# EAGLE board logic board R0.1 (EAGLE 5.10)
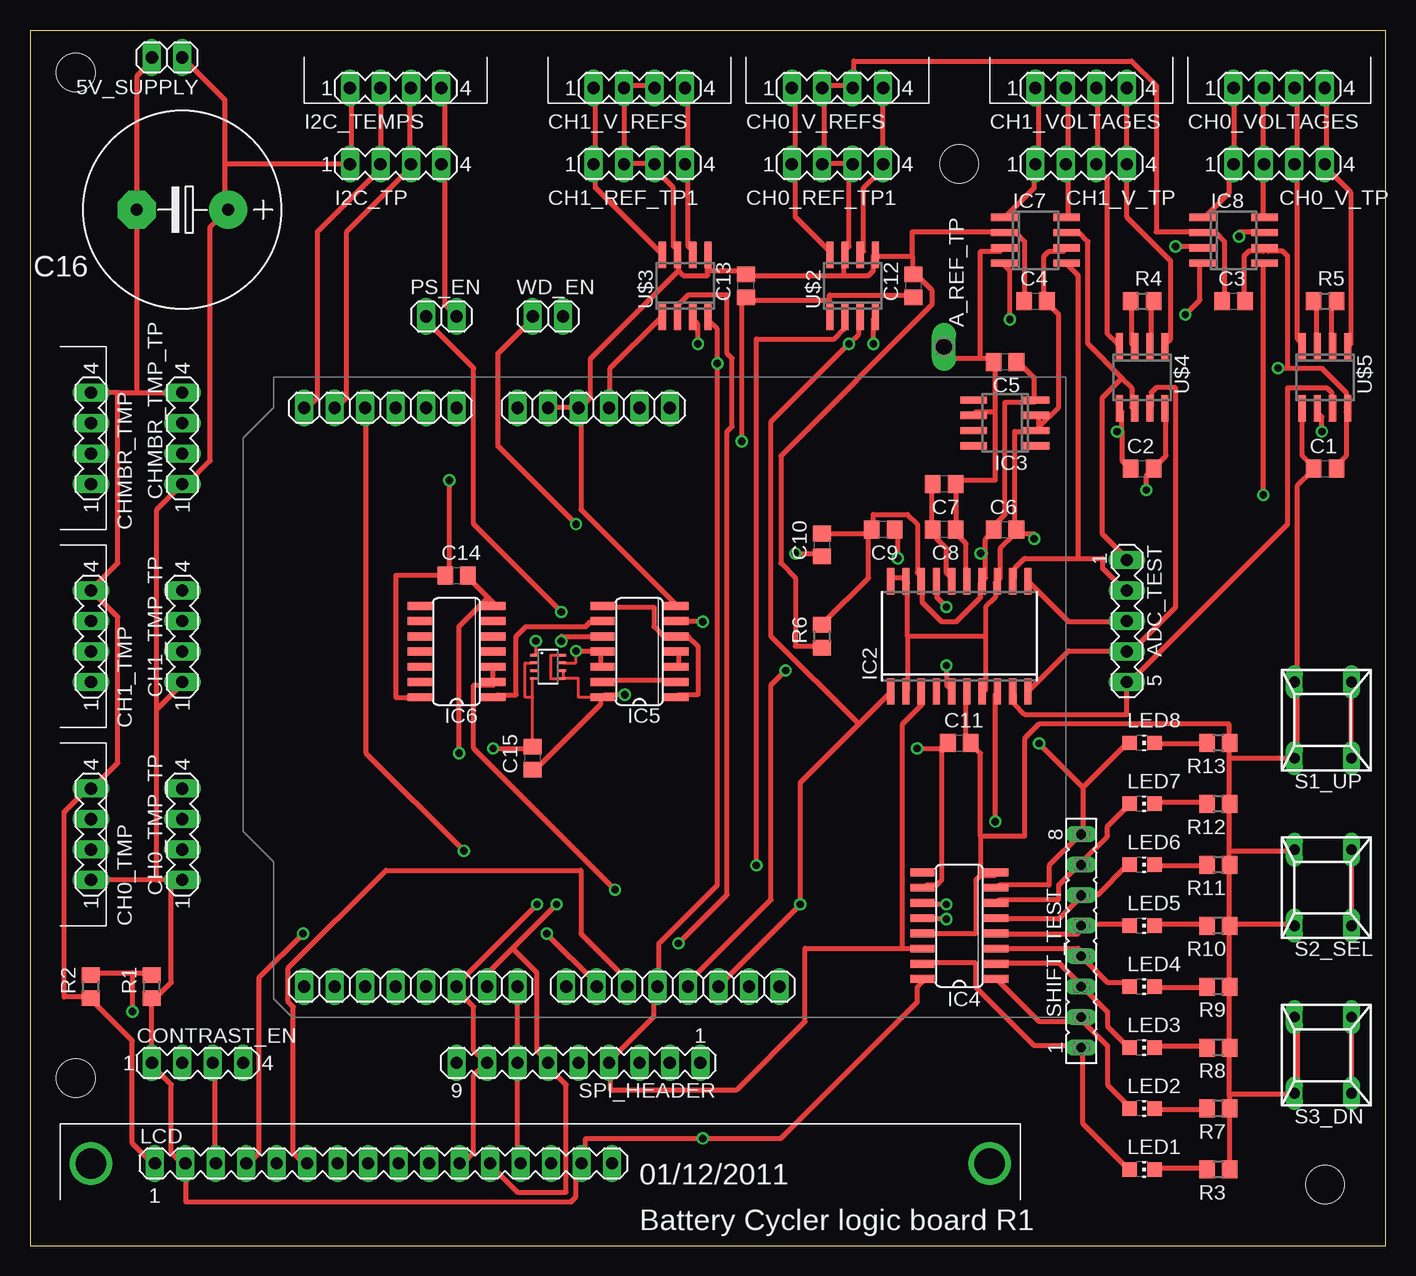
[diagram p0: board, top side]
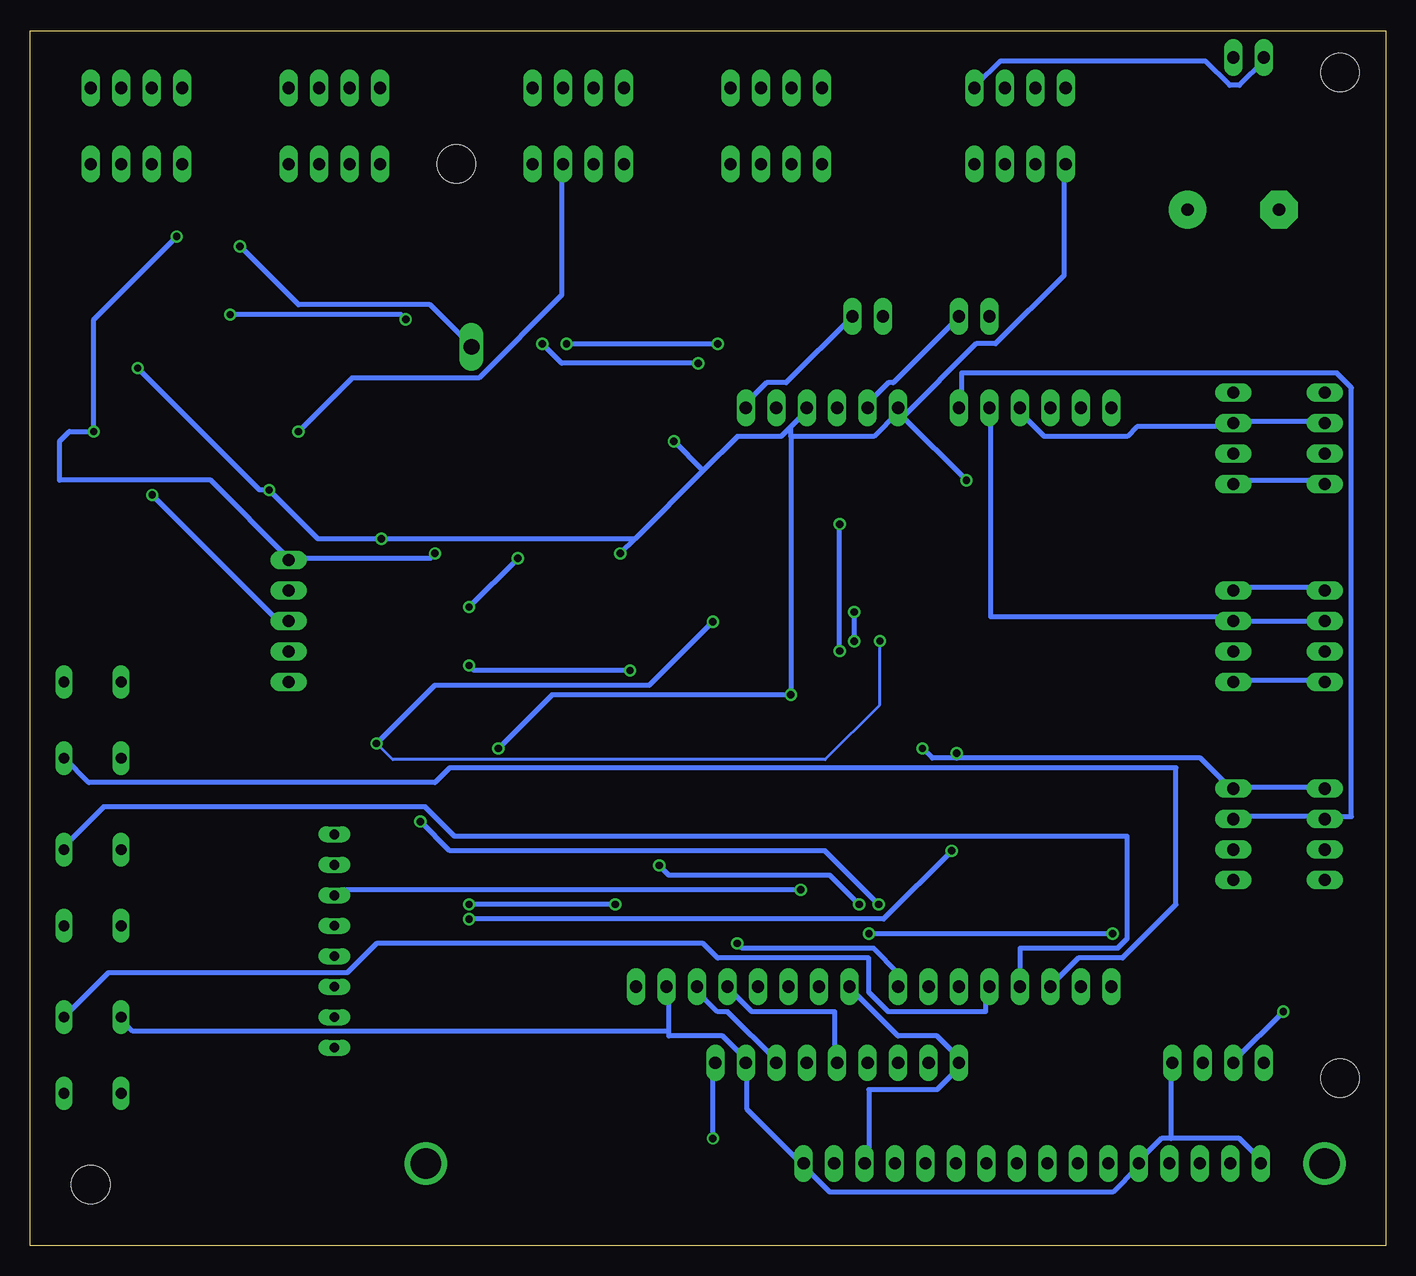
[diagram p1: board, bottom side, seen from below]

Size 113.01 x 101.27 mm. Coordinates in mm from the lower left corner, seen from the top.
Outline: 0,0 113.01,0 113.01,101.27 0,101.27 0,0
Copper layers (1*16): Top 0.035mm / dielectric 1.5mm / Bottom 0.035mm
Design rules "default *": minimum track width 16mil, minimum drill 24mil, track to track 8mil, track to pad 12mil, pad to pad 8mil, via to via 8mil, smd to smd 8mil, copper to edge 40mil, drill to drill 8mil, minimum pad ring 10mil, minimum via ring 8mil, stop-mask expansion 4mil, vias tented up to drill 0mil, thermal gap 10mil
Holes 3.2 mm at 3.81,97.79 3.81,13.97 107.95,5.08 77.47,90.17

## Footprints (pad centres in the part's own frame; a part is rotated, then mirrored left to right if it is on the bottom)
1X02 = drill 1.016 long: 1 -1.27,0; 2 1.27,0
P1-13Y = drill 1.321 pad 1.905 long: TP 0,0
MA05-1 = drill 1.016 long: 1 -5.08,0; 2 -2.54,0; 3 0,0; 4 2.54,0; 5 5.08,0
C0805 = smd 1.3 x 1.5: 1 -0.95,0; 2 0.95,0
E7,5-16 = drill 1.016 pad 3.15 round: + -3.81,0 | drill 1.016 pad 3.15 octagon: - 3.81,0
MA04-1 = drill 1.016 long: 1 -3.81,0; 2 -1.27,0; 3 1.27,0; 4 3.81,0
4PIN_HORIZONTAL_MOFIFIED = drill 1.016 long: 1 -3.81,0; 2 -1.27,0; 3 1.27,0; 4 3.81,0
ARDUINO2009_HOLELESS = drill 1.016 long: 1 33.02,2.54; 2 35.56,2.54; 3 38.1,2.54; 4 40.64,2.54; 5 43.18,2.54; 6 45.72,2.54; 7 50.8,2.54; 8 53.34,2.54; 9 55.88,2.54; 10 58.42,2.54; 11 60.96,2.54; 12 63.5,2.54; 13 63.5,50.8; 14 60.96,50.8; 15 58.42,50.8; 16 55.88,50.8; 17 53.34,50.8; 18 50.8,50.8; 19 48.26,50.8; 20 45.72,50.8; 21 41.656,50.8; 22 39.116,50.8; 23 36.576,50.8; 24 34.036,50.8; 25 31.496,50.8; 26 28.956,50.8; 27 26.416,50.8; 28 23.876,50.8
SO20W = smd 0.6 x 2.2: 1 -5.715,-4.6; 2 -4.445,-4.6; 3 -3.175,-4.6; 4 -1.905,-4.6; 5 -0.635,-4.6; 6 0.635,-4.6; 7 1.905,-4.6; 8 3.175,-4.6; 9 4.445,-4.6; 10 5.715,-4.6; 11 5.715,4.6; 12 4.445,4.6; 13 3.175,4.6; 14 1.905,4.6; 15 0.635,4.6; 16 -0.635,4.6; 17 -1.905,4.6; 18 -3.175,4.6; 19 -4.445,4.6; 20 -5.715,4.6
SO08 = smd 0.6 x 2.2: 1 -1.905,-2.6; 2 -0.635,-2.6; 3 0.635,-2.6; 4 1.905,-2.6; 5 1.905,2.6; 6 0.635,2.6; 7 -0.635,2.6; 8 -1.905,2.6
SO16 = smd 0.66 x 2.032: 1 -4.445,-3.073; 2 -3.175,-3.073; 3 -1.905,-3.073; 4 -0.635,-3.073; 5 0.635,-3.073; 6 1.905,-3.073; 7 3.175,-3.073; 8 4.445,-3.073; 9 4.445,3.073; 10 3.175,3.073; 11 1.905,3.073; 12 0.635,3.073; 13 -0.635,3.073; 14 -1.905,3.073; 15 -3.175,3.073; 16 -4.445,3.073
SO14 = smd 0.66 x 2.032: 1 -3.81,-3.073; 2 -2.54,-3.073; 3 -1.27,-3.073; 4 0,-3.073; 5 1.27,-3.073; 6 2.54,-3.073; 7 3.81,-3.073; 8 3.81,3.073; 9 2.54,3.073; 10 1.27,3.073; 11 0,3.073; 12 -1.27,3.073; 13 -2.54,3.073; 14 -3.81,3.073
HDM16216L-5_MODIFIED = drill 1.016 long: 1 -31.496,3.048; 2 -28.956,3.048; 3 -26.416,3.048; 4 -23.876,3.048; 5 -21.336,3.048; 6 -18.796,3.048; 7 -16.256,3.048; 8 -13.716,3.048; 9 -11.176,3.048; 10 -8.636,3.048; 11 -6.096,3.048; 12 -3.556,3.048; 13 -1.016,3.048; 14 1.524,3.048; 15 4.064,3.048; 16 6.604,3.048 | drill 2.54 round: P$1 -36.83,3.048; P$4 38.1,3.048
CHIP-LED0805 = smd 1.2 x 1.2: A 0,-1.05; C 0,1.05
R0805 = smd 1.3 x 1.5: 1 -0.95,0; 2 0.95,0
REKN = drill 0.9 long: 1A 0,6.35; 1B 0,0; 2A 4.763,6.35; 2B 4.763,0
FE08 = drill 0.813 long: 1 -8.89,0; 2 -6.35,0; 3 -3.81,0; 4 -1.27,0; 5 1.27,0; 6 3.81,0; 7 6.35,0; 8 8.89,0
MA09-1 = drill 1.016 long: 1 -10.16,0; 2 -7.62,0; 3 -5.08,0; 4 -2.54,0; 5 0,0; 6 2.54,0; 7 5.08,0; 8 7.62,0; 9 10.16,0
SOT23-8 = smd 0.203 x 0.406: 1 -0.975,-1.3; 2 -0.325,-1.3; 3 0.325,-1.3; 4 0.975,-1.3; 5 0.975,1.3; 6 0.325,1.3; 7 -0.325,1.3; 8 -0.975,1.3; P$3 -0.975,0.975; P$4 0.325,0.975; P$7 -0.325,0.975; P$8 0.975,0.975; P$9 -0.975,-0.975; P$10 -0.325,-0.975; P$11 0.325,-0.975; P$12 0.975,-0.975

## Placement (x,y rotation side)
5V_SUPPLY  [1X02]  11.43,99.06 180 top
A_REF_TP  TPPAD1-13Y  [P1-13Y]  76.2,74.93 0 top
ADC_TEST  [MA05-1]  91.44,52.07 270 top
C1  [C0805]  107.95,64.77 0 top
C2  [C0805]  92.71,64.77 0 top
C3  [C0805]  100.33,78.74 0 top
C4  [C0805]  83.82,78.74 0 top
C5  [C0805]  81.28,73.66 180 top
C6  [C0805]  81.28,59.69 0 top
C7  10u  [C0805]  76.2,63.5 180 top
C8  0.1u  [C0805]  76.2,59.69 180 top
C9  0.1u  [C0805]  71.12,59.69 180 top
C10  [C0805]  66.04,58.42 90 top
C11  [C0805]  77.47,41.91 0 top
C12  [C0805]  73.66,80.01 90 top
C13  [C0805]  59.69,80.01 90 top
C14  [C0805]  35.56,55.88 0 top
C15  [C0805]  41.91,40.64 90 top
C16  [E7,5-16]  12.7,86.36 180 top
CH0_REF_TP1  [MA04-1]  67.31,90.17 0 top
CH0_TMP  [4PIN_HORIZONTAL_MOFIFIED]  5.08,34.29 90 top
CH0_TMP_TP  [MA04-1]  12.7,34.29 90 top
CH0_V_REFS  [4PIN_HORIZONTAL_MOFIFIED]  67.31,96.52 0 top
CH0_V_TP  [MA04-1]  104.14,90.17 0 top
CH0_VOLTAGES  [4PIN_HORIZONTAL_MOFIFIED]  104.14,96.52 0 top
CH1_REF_TP1  [MA04-1]  50.8,90.17 0 top
CH1_TMP  [4PIN_HORIZONTAL_MOFIFIED]  5.08,50.8 90 top
CH1_TMP_TP  [MA04-1]  12.7,50.8 90 top
CH1_V_REFS  [4PIN_HORIZONTAL_MOFIFIED]  50.8,96.52 0 top
CH1_V_TP  [MA04-1]  87.63,90.17 0 top
CH1_VOLTAGES  [4PIN_HORIZONTAL_MOFIFIED]  87.63,96.52 0 top
CHMBR_TMP  [4PIN_HORIZONTAL_MOFIFIED]  5.08,67.31 90 top
CHMBR_TMP_TP  [MA04-1]  12.7,67.31 90 top
CONTRAST_EN  [MA04-1]  13.97,15.24 0 top
I2C_TEMPS  [4PIN_HORIZONTAL_MOFIFIED]  30.48,96.52 0 top
I2C_TP  [MA04-1]  30.48,90.17 0 top
IC1  [ARDUINO2009_HOLELESS]  86.36,72.39 180 top
IC2  [SO20W]  77.47,50.8 0 top
IC3  REF198D  [SO08]  81.28,68.58 90 top
IC4  74LS595D  [SO16]  77.47,26.67 90 top
IC5  74S02D  [SO14]  50.8,49.53 90 top
IC6  74S02D  [SO14]  35.56,49.53 90 top
IC7  AD8210D  [SO08]  83.82,83.82 270 top
IC8  AD8210D  [SO08]  100.33,83.82 270 top
LCD  [HDM16216L-5_MODIFIED]  41.91,3.81 0 top
LED1  [CHIP-LED0805]  92.71,6.35 270 top
LED2  [CHIP-LED0805]  92.71,11.43 270 top
LED3  [CHIP-LED0805]  92.71,16.51 270 top
LED4  [CHIP-LED0805]  92.71,21.59 270 top
LED5  [CHIP-LED0805]  92.71,26.67 270 top
LED6  [CHIP-LED0805]  92.71,31.75 270 top
LED7  [CHIP-LED0805]  92.71,36.83 270 top
LED8  [CHIP-LED0805]  92.71,41.91 270 top
PS_EN  [1X02]  34.29,77.47 0 top
R1  10K  [R0805]  10.16,21.59 90 top
R2  10  [R0805]  5.08,21.59 90 top
R3  [R0805]  99.06,6.35 180 top
R4  [R0805]  92.71,78.74 0 top
R5  [R0805]  107.95,78.74 0 top
R6  0  [R0805]  66.04,50.8 90 top
R7  [R0805]  99.06,11.43 180 top
R8  [R0805]  99.06,16.51 180 top
R9  [R0805]  99.06,21.59 180 top
R10  [R0805]  99.06,26.67 180 top
R11  [R0805]  99.06,31.75 180 top
R12  [R0805]  99.06,36.83 180 top
R13  [R0805]  99.06,41.91 180 top
S1_UP  [REKN]  105.41,40.64 0 top
S2_SEL  [REKN]  105.41,26.67 0 top
S3_DN  [REKN]  105.41,12.7 0 top
SHIFT_TEST  [FE08]  87.63,25.4 90 top
SPI_HEADER  [MA09-1]  45.72,15.24 180 top
U$1  MAX6370KA  [SOT23-8]  43.18,48.26 270 top
U$2  MCP4822  [SO08]  68.58,80.01 0 top
U$3  MCP4822  [SO08]  54.61,80.01 0 top
U$4  AD8221  [SO08]  92.71,72.39 180 top
U$5  AD8221  [SO08]  107.95,72.39 180 top
WD_EN  [1X02]  43.18,77.47 0 top

## Library data of the parts
5V_SUPPLY PS_EN WD_EN = pinhead
A_REF_TP = testpad
ADC_TEST CH0_REF_TP1 CH0_TMP_TP CH0_V_TP CH1_REF_TP1 CH1_TMP_TP CH1_V_TP CHMBR_TMP_TP CONTRAST_EN I2C_TP SPI_HEADER = con-lstb
C1-C16 R1-R13 = rcl
CH0_TMP CH0_V_REFS CH0_VOLTAGES CH1_TMP CH1_V_REFS CH1_VOLTAGES CHMBR_TMP I2C_TEMPS IC2 IC3 IC7 IC8 LCD S1_UP S2_SEL S3_DN U$1-U$5 = NEWPARTS
IC1 = arduino
IC4-IC6 = 74xx-us
LED1-LED8 = led
SHIFT_TEST = con-lsta

## Nets
595_LATCH: IC1.10 IC4.12
+3V3: IC1.2
+5V: 5V_SUPPLY.1 C1.2 C2.2 C3.2 C4.2 C6.2 C10.1 C11.1 C12.1 C13.1 C14.1 C15.1 C16.+ CH0_TMP.1 CH0_TMP_TP.1 CH1_TMP.1 CH1_TMP_TP.1 CHMBR_TMP.1 CHMBR_TMP_TP.1 CONTRAST_EN.1 I2C_TEMPS.1 I2C_TP.1 IC1.3 IC1.6 IC2.2 IC2.7 IC2.13 IC2.19 IC2.20 IC3.2 IC3.3 IC4.10 IC4.16 IC5.14 IC6.14 IC7.6 IC8.6 LCD.2 LCD.15 R1.1 SPI_HEADER.1 U$1.5 U$1.6 U$1.8 U$2.1 U$3.1 U$4.8 U$5.8
GND: 5V_SUPPLY.2 C1.1 C2.1 C3.1 C4.1 C11.2 C12.2 C13.2 C14.2 C15.2 C16.- CH0_REF_TP1.2 CH0_REF_TP1.3 CH0_TMP.4 CH0_TMP_TP.4 CH0_V_REFS.2 CH0_V_REFS.3 CH1_REF_TP1.2 CH1_REF_TP1.3 CH1_TMP.4 CH1_TMP_TP.4 CH1_V_REFS.2 CH1_V_REFS.3 CHMBR_TMP.4 CHMBR_TMP_TP.4 CONTRAST_EN.4 I2C_TEMPS.4 I2C_TP.4 IC1.4 IC1.5 IC1.27 IC2.6 IC4.8 IC4.13 IC5.7 IC6.7 IC7.2 IC8.2 LCD.1 LCD.5 LCD.16 PS_EN.2 R2.1 R3.1 R6.1 R7.1 R8.1 R9.1 R10.1 R11.1 R12.1 R13.1 S1_UP.1A S1_UP.1B S2_SEL.1A S2_SEL.1B S3_DN.1A S3_DN.1B SPI_HEADER.2 U$1.2 U$1.4 U$2.5 U$2.7 U$3.5 U$3.7 U$4.5 U$5.5
GNDA: ADC_TEST.1 C5.1 C6.1 C9.2 C10.2 IC2.14 IC2.18 IC3.4 IC7.7 IC8.7 R6.2 U$4.6 U$5.6
LCD_D4/CS_ADC1: IC1.18 IC2.8 LCD.11 SPI_HEADER.8
LCD_D5/CS_DAC1: IC1.19 LCD.12 SPI_HEADER.6 U$2.2
LCD_D6/CS_DAC2: IC1.20 LCD.13 SPI_HEADER.7 U$3.2
LCD_D7/CS_AUX: IC1.21 LCD.14 SPI_HEADER.9
LCD_ENABLE: IC1.23 LCD.6
LCD_RS: IC1.22 LCD.4
MISO: IC1.25 IC2.5 SPI_HEADER.5
MOSI: IC1.24 IC2.3 IC4.14 SPI_HEADER.4 U$2.4 U$3.4
N$1: CONTRAST_EN.3 LCD.3
N$2: R4.2 U$4.2
N$3: R4.1 U$4.3
N$4: R5.2 U$5.2
N$5: R5.1 U$5.3
N$6: CH1_V_TP.3 CH1_VOLTAGES.3 U$4.4
N$7: CH1_V_TP.4 CH1_VOLTAGES.4 U$4.1
N$8: CH0_V_TP.3 CH0_VOLTAGES.3 U$5.4
N$9: CH0_V_TP.4 CH0_VOLTAGES.4 U$5.1
N$10: A_REF_TP.TP C5.2 C7.1 C8.1 IC2.15 IC3.6 IC7.3 IC8.3
N$11: C7.2 C8.2 IC2.16
N$12: IC4.5 IC6.2 IC6.3 LED6.A SHIFT_TEST.6
N$13: C9.1 IC2.17
N$14: ADC_TEST.2 IC2.12 IC7.5
N$15: ADC_TEST.3 IC2.11 IC8.5
N$16: ADC_TEST.4 IC2.10 U$4.7
N$17: ADC_TEST.5 IC2.9 U$5.7
N$18: IC1.1 WD_EN.2
N$19: IC5.1 IC5.5 IC5.8
N$20: IC5.3 IC5.4
N$21: IC5.11 IC5.12 U$1.7 WD_EN.1
N$22: IC5.9 IC6.1
N$23: IC4.7 IC5.6 LED8.A SHIFT_TEST.8 U$1.1
N$24: IC5.2 IC5.13
N$25: CH0_V_TP.2 CH0_VOLTAGES.2 IC8.8
N$26: CH0_V_TP.1 CH0_VOLTAGES.1 IC8.1
N$27: CH1_V_TP.2 CH1_VOLTAGES.2 IC7.8
N$28: CH1_V_TP.1 CH1_VOLTAGES.1 IC7.1
N$29: CH1_REF_TP1.4 CH1_V_REFS.4 U$3.6
N$30: CH1_REF_TP1.1 CH1_V_REFS.1 U$3.8
N$31: CH0_REF_TP1.1 CH0_V_REFS.1 U$2.8
N$32: CH0_REF_TP1.4 CH0_V_REFS.4 U$2.6
N$33: IC5.10 PS_EN.1
N$34: IC4.15 LED1.A SHIFT_TEST.1
N$35: IC4.1 LED2.A SHIFT_TEST.2
N$36: IC4.2 LED3.A SHIFT_TEST.3
N$37: IC4.3 LED4.A SHIFT_TEST.4
N$38: IC4.4 LED5.A SHIFT_TEST.5
N$39: IC4.6 LED7.A SHIFT_TEST.7
N$40: LED1.C R3.2
N$41: LED2.C R7.2
N$42: LED3.C R8.2
N$43: LED4.C R9.2
N$44: LED5.C R10.2
N$45: LED6.C R11.2
N$46: LED7.C R12.2
N$47: LED8.C R13.2
N$48: CONTRAST_EN.2 R1.2 R2.2
N$49: I2C_TEMPS.2 I2C_TP.2 IC1.12
N$50: I2C_TEMPS.3 I2C_TP.3 IC1.11
N$57: CHMBR_TMP.3 CHMBR_TMP_TP.3 IC1.9
N$58: CH1_TMP.3 CH1_TMP_TP.3 IC1.8
N$59: CH0_TMP.3 CH0_TMP_TP.3 IC1.7
NC: IC7.4 IC8.4
PB_DN: IC1.17 S3_DN.2A S3_DN.2B
PB_SEL: IC1.16 S2_SEL.2A S2_SEL.2B
PB_UP: IC1.15 S1_UP.2A S1_UP.2B
SCK: IC1.26 IC2.1 IC4.11 SPI_HEADER.3 U$2.3 U$3.3
TP1: IC3.5

## Tracks (layer width: path | path; a pad name or v marks a point on that pad's centre or on a via)
595_LATCH  (via drill 0.61)
  Top 0.406: v76.4,27.23 74.78,27.23 IC4.12 | v36.17,32.92 28.04,41.05 28.04,69.49 IC1.10
  Bottom 0.406: v76.4,27.23 41.86,27.23 v36.17,32.92
+5V  (via drill 0.61)
  Top 0.254: U$1.5 45.72,47.28 45.72,45.72 IC5.14 | U$1.8 43.43,49.23 43.43,47.24 44.48,47.24 U$1.5 | U$1.5 U$1.6
  Top 0.406: IC2.20 71.93,55.68 72.75,55.68 IC2.19 73.15,55.27 73.15,50.8 | 73.15,50.8 73.15,46.33 IC2.2 | IC7.6 86.16,82.91 84.94,82.91 84.53,82.5 84.53,78.84 C4.2 84.94,78.44 85.75,77.62 85.75,69.9 84.12,68.28 | 84.12,68.28 84.12,69.09 IC3.3 | 84.12,68.28 84.12,67.87 IC3.2 83.72,67.87 82.09,67.87 82.09,59.74 C6.2 | C6.2 82.09,59.33 80.87,58.12 80.87,55.68 IC2.13 80.47,55.27 80.47,54.05 79.65,53.24 79.65,50.8 | 79.65,50.8 79.65,46.33 IC2.7 | 79.65,50.8 73.15,50.8 | C1.2 108.92,65.02 109.73,65.84 109.73,69.49 U$5.8 109.73,69.9 109.73,71.12 107.7,73.15 104.85,73.15 | C3.2 101.19,78.84 101.19,82.5 101.6,82.91 102.82,82.91 IC8.6 103.23,82.91 104.44,82.91 104.85,82.5 104.85,73.15 | v34.95,63.8 34.95,56.08 C14.1 30.48,55.88 30.48,45.72 IC6.14 | 66.65,78.84 59.74,78.84 C13.1 59.33,78.84 v59.33,67.06 | 66.65,78.84 66.65,77.62 U$2.1 | 66.65,78.84 66.65,79.25 73.56,79.25 C12.1 | 76,41.45 76.4,41.86 C11.1 76,41.45 | 76,41.45 76,30.48 75.59,30.07 74.78,30.07 IC4.10 | C15.1 42.27,39.83 47.55,45.11 47.55,45.52 IC5.14 47.95,45.92 v49.58,45.92 | U$4.8 94.69,69.49 94.69,65.84 93.88,65.02 C2.2 93.47,64.62 93.07,64.21 v93.07,62.99 | v63.8,57.71 65.84,57.71 C10.1 | U$3.1 52.43,77.22 48.36,73.15 48.36,69.9 IC1.3 | v73.97,41.45 76,41.45 | v104.04,73.15 104.85,73.15 | v83.72,58.93 83.72,59.33 82.5,59.33 C6.2 | IC4.16 74.37,21.95 73.97,21.54 73.97,20.32 62.59,8.94 v56.08,8.94 46.33,8.94 46.33,6.91 LCD.15 45.92,6.5 45.52,6.1 45.52,4.06 45.11,3.66 13.01,3.66 13.01,6.5 LCD.2 12.6,6.91 11.79,7.72 11.79,13.41 10.16,15.04 CONTRAST_EN.1 10.16,20.32 | I2C_TEMPS.1 26.82,96.32 26.82,90.22 I2C_TP.1 26.42,90.22 16.26,90.22
  Top 0.406: 16.26,90.22 16.26,86.56 C16.+ 16.26,86.16 15.04,84.94 15.04,65.43 13.01,63.4 CHMBR_TMP_TP.1 10.57,61.37 10.57,44.7 | 16.26,90.22 16.26,95.5 5V_SUPPLY.1 | 11.79,30.48 10.57,30.48 | 10.57,30.48 CH0_TMP.1 | 11.79,30.48 CH0_TMP_TP.1 12.6,30.48 | 11.79,30.48 11.79,21.95 10.16,20.32 | 10.16,20.32 R1.1 | 10.57,44.7 12.6,46.74 CH1_TMP_TP.1 | 10.57,30.48 10.57,44.7
  Bottom 0.406: 40.23,69.09 40.64,69.49 | 40.23,69.09 v34.95,63.8 | 56.9,64.62 54.05,67.46 50.39,67.46 49.58,68.28 | 56.9,64.62 62.59,58.93 | 62.59,58.93 v63.8,57.71 | 49.58,68.28 48.36,69.49 IC1.3 | 62.59,58.93 v83.72,58.93 89,58.93 v93.07,62.99 93.88,62.99 v104.04,73.15 | 49.58,67.46 49.58,68.28 | 49.58,67.46 v49.58,45.92 69.49,45.92 v73.97,41.45 | 56.9,64.62 v59.33,67.06 | 40.64,69.49 42.67,67.46 49.58,67.46 | 40.64,69.49 IC1.6 40.23,69.09 | v56.08,8.94 56.08,15.04 SPI_HEADER.1 | CHMBR_TMP.1 5.28,63.8 12.6,63.8 CHMBR_TMP_TP.1 | CH1_TMP.1 5.28,47.14 12.6,47.14 CH1_TMP_TP.1 | 40.23,69.09 34.14,75.18 32.51,75.18 26.82,80.87 26.82,89.81 I2C_TP.1
GND  (via drill 0.61)
  Top 0.254: U$1.2 41.27,48.59 41.27,45.72 41.91,45.72 | C15.2 41.91,45.72 | U$1.4 41.91,47.28 41.91,45.72
  Top 0.406: I2C_TEMPS.4 34.54,96.32 34.54,90.22 I2C_TP.4 34.54,89.81 34.54,78.44 35.36,77.62 PS_EN.2 | IC5.7 53.65,53.65 45.92,61.37 45.92,69.49 IC1.4 | IC1.5 43.48,69.9 45.52,69.9 IC1.4 | C4.1 82.91,78.84 82.91,83.72 82.09,84.53 81.28,84.53 IC7.2 80.87,84.53 73.56,84.53 73.56,82.5 | R6.1 65.84,49.99 63.8,49.99 63.8,55.68 62.59,56.9 62.59,65.84 75.18,78.44 75.18,79.65 73.97,80.87 C12.2 73.56,81.28 73.56,82.5 | 73.56,82.5 70.71,82.5 U$2.5 70.31,82.5 70.31,81.28 69.9,80.87 67.87,80.87 | 56.49,81.28 59.33,81.28 C13.2 59.74,80.87 67.87,80.87 | 56.49,81.28 56.49,82.5 U$3.5 | 54.05,81.28 54.05,82.5 U$3.7 54.05,82.91 53.65,83.31 53.65,88.19 52.43,89.41 52.43,89.81 CH1_REF_TP1.3 52.02,90.22 49.58,90.22 | 54.05,81.28 54.46,80.87 56.49,80.87 56.49,81.28 | CH1_V_REFS.3 52.02,96.72 49.58,96.72 CH1_V_REFS.2 49.58,96.32 49.58,90.22 | 49.58,90.22 CH1_REF_TP1.2 | C3.1 99.57,78.84 99.57,83.72 98.75,84.53 97.94,84.53 IC8.2 97.54,84.53 93.88,84.53 93.88,96.72 91.85,98.75 68.68,98.75 68.68,96.72 CH0_V_REFS.3 68.28,96.72 66.24,96.72 CH0_V_REFS.2 66.24,96.32 66.24,90.22 | 91.03,67.87 91.03,69.49 U$4.5 | 91.03,67.87 91.03,65.43 91.44,65.02 C2.1 | 66.24,90.22 68.28,90.22 CH0_REF_TP1.3 68.28,89.81 68.28,83.31 67.87,82.91 U$2.7 67.87,82.5 67.87,80.87 | v90.63,67.87 91.03,67.87 | 66.24,90.22 CH0_REF_TP1.2 | 54.05,81.28 46.74,73.97 46.74,70.71 45.92,69.9 IC1.4 | IC2.6 78.03,45.92 78.03,42.27 C11.2 78.44,41.86 79.25,41.05 79.25,34.14 | 79.25,30.89 78.84,30.48 78.84,26.01 74.78,26.01 IC4.13 | 79.25,30.89 80.47,30.89 IC4.8 | 79.25,34.14 79.25,30.89 | R10.1 99.97,26.42 99.97,21.95 R9.1 99.97,21.54 99.97,16.66 R8.1 99.97,16.26 99.97,12.6
  Top 0.406: S2_SEL.1B 105.26,26.82 100.38,26.82 R10.1 | R3.1 99.97,6.5 99.97,11.38 R7.1 99.97,11.79 99.97,12.6 | 99.97,12.6 105.26,12.6 S3_DN.1B 105.66,13.01 105.66,18.69 S3_DN.1A | U$5.5 106.07,69.49 106.07,65.84 106.88,65.02 C1.1 106.88,64.62 105.66,63.4 105.66,47.14 S1_UP.1A 105.66,46.74 105.66,40.64 S1_UP.1B 99.97,40.64 | 99.97,32.92 99.97,36.58 R12.1 99.97,36.98 99.97,40.64 | 99.97,32.92 99.97,32.11 R11.1 99.97,31.7 99.97,26.82 R10.1 | 99.97,40.64 99.97,41.86 R13.1 99.97,42.27 99.97,43.48 84.12,43.48 82.91,42.27 82.91,34.14 79.25,34.14 | 99.97,32.92 105.26,32.92 S2_SEL.1A | LCD.1 10.16,6.91 8.53,8.53 8.53,17.07 5.28,20.32 R2.1 4.88,20.73 2.85,20.73 2.85,36.17 4.88,38.2 CH0_TMP.4 5.28,38.2 7.32,40.23 7.32,52.43 5.28,54.46 CH1_TMP.4 5.28,54.86 7.32,56.9 7.32,71.12 | 5V_SUPPLY.2 10.16,98.75 8.94,97.54 8.94,86.56 C16.- 8.94,86.16 8.94,71.12 | 7.32,71.12 8.94,71.12 | 7.32,71.12 CHMBR_TMP.4 | 8.94,71.12 CHMBR_TMP_TP.4 | 38.2,54.05 38.61,53.65 IC6.7 | 38.2,54.05 36.58,55.68 C14.2 | v38.61,41.45 41.86,41.45 C15.2 | 38.2,54.05 35.76,51.61 v35.76,41.05
  Bottom 0.406: PS_EN.2 35.76,77.22 41.05,71.93 41.45,71.93 43.48,69.9 IC1.5 | v90.63,67.87 86.16,72.34 75.59,72.34 68.68,79.25 68.68,89.81 CH0_REF_TP1.3 | 59.74,17.88 59.74,17.48 55.27,17.48 53.24,15.44 SPI_HEADER.2 53.24,15.04 53.24,11.38 48.77,6.91 LCD.16 48.36,6.5 46.33,4.47 22.76,4.47 20.73,6.5 LCD.5 20.73,6.91 18.69,8.94 17.88,8.94 | 59.74,17.88 59.74,21.54 IC1.27 | 17.88,8.94 17.88,15.04 CONTRAST_EN.4 | 17.88,8.94 12.19,8.94 10.16,6.91 LCD.1 | CH1_TMP.4 5.28,54.86 12.6,54.86 CH1_TMP_TP.4 | v38.61,41.45 37.8,40.64 35.76,40.64 | 35.76,40.64 15.44,40.64 13.01,38.2 CH0_TMP_TP.4 12.6,38.2 5.28,38.2 CH0_TMP.4 | 35.76,40.64 v35.76,41.05 | 59.74,17.88 104.44,17.88 105.26,18.69 S3_DN.1A | I2C_TEMPS.4 34.14,96.72 32.11,98.75 15.04,98.75 13.01,96.72 12.19,96.72 10.16,98.75 5V_SUPPLY.2
GNDA  (via drill 0.61)
  Top 0.406: 69.9,59.33 69.9,55.68 66.24,52.02 R6.2 | 69.9,59.33 66.24,59.33 C10.2 | 69.9,59.33 C9.2 70.31,59.74 70.31,60.96 73.15,60.96 73.97,60.15 73.97,56.08 74.37,55.68 IC2.18 74.37,55.27 74.37,53.65 76,52.02 77.22,52.02 79.25,54.05 79.25,55.27 IC2.14 79.65,55.68 79.65,57.71 | C5.1 82.5,73.56 83.72,72.34 83.72,70.71 IC3.4 83.72,70.31 81.28,70.31 81.28,60.96 80.47,60.15 80.47,59.74 C6.1 80.06,59.33 79.65,58.93 79.65,57.71 | 91.03,72.34 88.19,75.18 88.19,83.72 87.38,84.53 86.56,84.53 IC7.7 | 91.03,72.34 91.85,71.53 91.85,69.9 U$4.6 | v107.7,67.87 107.7,69.09 107.29,69.49 U$5.6 | v100.79,84.12 100.79,84.53 102.82,84.53 IC8.7 | 91.03,72.34 89.41,70.71 89.41,59.33 91.44,57.3 ADC_TEST.1 | 79.65,57.71 v79.25,57.71
  Bottom 0.406: 91.44,57.3 97.94,63.8 110.54,63.8 110.54,67.06 109.73,67.87 v107.7,67.87 107.7,77.22 v100.79,84.12 | v79.25,57.71 79.65,57.3 91.44,57.3 | 91.44,57.3 ADC_TEST.1
LCD_D4/CS_ADC1  (via drill 0.61)
  Top 0.406: LCD.11 36.17,6.91 36.98,7.72 36.98,14.22 37.8,15.04 SPI_HEADER.8 37.8,15.44 36.98,16.26 36.98,19.91 35.76,21.13 35.76,21.54 IC1.18 35.76,21.95 v42.27,28.45 | v80.47,35.36 80.47,45.92 IC2.8
  Bottom 0.406: v80.47,35.36 78.03,32.92 46.74,32.92 v42.27,28.45
LCD_D5/CS_DAC1  (via drill 0.61)
  Top 0.406: LCD.12 38.61,6.5 40.64,4.47 44.7,4.47 44.7,13.41 43.48,14.63 43.48,15.04 SPI_HEADER.6 43.08,15.44 42.27,16.26 42.27,22.76 40.23,24.79 | v60.55,31.7 60.55,75.59 67.06,75.59 67.87,76.4 67.87,77.22 U$2.2 | 40.23,24.79 38.2,22.76 38.2,21.95 IC1.19 | 40.23,24.79 v43.89,28.45
  Bottom 0.406: v60.55,31.7 59.74,30.89 46.33,30.89 v43.89,28.45
LCD_D6/CS_DAC2  (via drill 0.61)
  Top 0.406: v54.05,25.2 58.12,29.26 58.12,67.87 58.52,68.28 58.52,73.97 58.12,74.37 58.12,79.25 54.86,79.25 54.05,78.44 54.05,77.62 U$3.2 | IC1.20 SPI_HEADER.7 40.64,6.91 LCD.13
  Bottom 0.406: v54.05,25.2 53.65,24.79 42.67,24.79 40.64,22.76 IC1.20
LCD_D7/CS_AUX
  Bottom 0.406: LCD.14 43.08,6.91 43.08,13.01 37.39,13.01 35.36,15.04 SPI_HEADER.9 35.36,15.44 37.39,17.48 40.64,17.48 44.7,21.54 IC1.21
LCD_ENABLE
  Top 0.406: LCD.6 22.76,6.91 21.95,7.72 21.95,19.91 21.54,20.32 21.54,23.16 29.67,31.29 45.92,31.29 45.92,26.01 49.58,22.35 49.58,21.95 IC1.23
LCD_RS  (via drill 0.61)
  Top 0.406: v22.76,26.01 19.1,22.35 19.1,7.72 18.29,6.91 LCD.4 | v43.08,26.01 47.14,21.95 IC1.22
  Bottom 0.406: v22.76,26.01 v43.08,26.01
MISO  (via drill 0.61)
  Top 0.406: v76.4,48.36 76.4,46.74 76.81,46.33 IC2.5 | v62.99,47.95 61.77,46.74 61.77,28.85 54.86,21.95 IC1.25
  Bottom 0.406: v76.4,48.36 76,47.95 v62.99,47.95 | SPI_HEADER.5 45.92,15.44 45.92,19.51 52.83,19.51 54.86,21.54 IC1.25
MOSI  (via drill 0.61)
  Top 0.406: 72.75,24.79 74.37,24.79 IC4.14 | 72.75,24.79 72.75,43.48 74.37,45.11 74.37,45.92 IC2.3 | U$3.4 56.49,77.22 57.3,76.4 v57.3,73.56 57.3,30.07 52.43,25.2 52.43,21.95 IC1.24 52.02,21.54 52.02,19.1 48.36,15.44 SPI_HEADER.4 48.36,15.04 48.36,13.01 58.93,13.01 64.62,18.69 64.62,24.79 72.75,24.79 | v70.31,75.18 70.31,77.22 U$2.4
  Bottom 0.406: v70.31,75.18 68.68,73.56 v57.3,73.56
N$1
  Top 0.406: CONTRAST_EN.3 15.44,15.04 15.44,6.91 LCD.3
N$2
  Top 0.406: R4.2 93.47,78.44 93.47,75.18 U$4.2
N$3
  Top 0.406: R4.1 91.85,78.44 91.85,75.18 U$4.3
N$4
  Top 0.406: R5.2 108.51,78.44 108.51,75.18 U$5.2
N$5
  Top 0.406: R5.1 107.29,78.44 107.29,75.18 U$5.3
N$6
  Top 0.406: U$4.4 90.63,75.18 89.81,76 89.81,89 89,89.81 CH1_V_TP.3 89,90.22 89,96.32 CH1_VOLTAGES.3
N$7
  Top 0.406: U$4.1 94.69,75.18 95.1,75.59 95.1,82.09 91.44,85.75 CH1_V_TP.4 CH1_VOLTAGES.4
N$8
  Top 0.406: U$5.4 106.07,75.18 105.66,75.59 105.66,89.81 CH0_V_TP.3 105.66,90.22 105.66,96.32 CH0_VOLTAGES.3
N$9
  Top 0.406: U$5.1 110.13,75.18 110.13,87.78 108.1,89.81 CH0_V_TP.4 108.1,90.22 108.1,96.32 CH0_VOLTAGES.4
N$10  (via drill 0.61)
  Top 0.406: IC2.15 78.03,55.68 78.03,58.52 77.22,59.33 C8.1 77.22,59.74 77.22,63.4 C7.1 77.22,63.8 80.47,63.8 80.47,69.49 | 79.25,73.97 76.4,73.97 76.4,74.78 A_REF_TP.TP | 79.25,73.97 80.06,73.97 C5.2 80.47,73.56 80.47,69.49 | 80.47,69.49 78.84,69.49 IC3.6 | 79.25,73.97 79.25,82.91 80.87,82.91 IC7.3 | v95.5,83.31 97.54,83.31 IC8.3
  Bottom 0.406: v95.5,83.31 90.63,78.44 79.65,78.44 76.4,75.18 A_REF_TP.TP
N$11
  Top 0.406: C7.2 75.18,63.4 75.18,59.74 C8.2 75.59,59.33 75.59,58.93 76.4,58.12 76.4,56.08 76.81,55.68 IC2.16
N$12  (via drill 0.61)
  Top 0.406: IC6.3 38.61,47.95 38.61,47.14 IC6.2 38.61,46.74 36.98,46.74 36.98,41.45 v48.77,29.67 | LED6.A 91.44,31.7 89,29.26 87.78,29.26 SHIFT_TEST.6 87.38,28.85 85.75,27.23 80.87,27.23 IC4.5
  Bottom 0.406: v48.77,29.67 86.97,29.67 87.38,29.26 SHIFT_TEST.6
N$13  (via drill 0.61)
  Top 0.406: v72.34,57.3 72.34,59.33 C9.1 | v76.4,53.24 75.59,54.05 75.59,55.27 IC2.17
  Bottom 0.406: v76.4,53.24 v72.34,57.3
N$14
  Top 0.406: 87.38,57.3 89.41,57.3 89.41,56.49 91.44,54.46 ADC_TEST.2 | 87.38,57.3 82.91,57.3 82.09,56.49 82.09,55.68 IC2.12 | 87.38,57.3 87.38,80.87 86.56,81.69 IC7.5
N$15  (via drill 0.61)
  Top 0.406: IC2.11 83.31,55.27 86.56,52.02 91.44,52.02 ADC_TEST.3 | v102.82,62.59 102.82,81.69 IC8.5
  Bottom 0.406: v102.82,62.59 92.66,52.43 91.44,52.43 ADC_TEST.3
N$16
  Top 0.406: IC2.10 83.31,46.33 86.56,49.58 91.44,49.58 ADC_TEST.4 91.44,49.17 95.5,53.24 95.5,71.53 93.88,71.53 93.47,71.12 93.47,69.9 U$4.7
N$17
  Top 0.406: 91.44,46.74 91.44,44.3 82.91,44.3 82.09,45.11 82.09,45.92 IC2.9 | 91.44,46.74 104.85,60.15 104.85,71.53 108.1,71.53 108.51,71.12 108.51,69.9 U$5.7 | 91.44,46.74 ADC_TEST.5
N$18
  Bottom 0.406: WD_EN.2 49.99,71.93 51.61,71.93 53.65,69.9 IC1.1
N$19
  Top 0.406: IC5.1 54.05,45.92 55.68,45.92 55.68,49.99 54.86,50.8 IC5.5 52.83,50.8 52.02,51.61 52.02,53.24 47.95,53.24 IC5.8
N$20
  Top 0.406: IC5.3 54.05,48.36 54.05,49.58 IC5.4
N$21  (via drill 0.61)
  Top 0.254: U$1.7 45.52,48.59 v45.52,49.58
  Top 0.406: 47.55,49.58 47.55,48.36 IC5.12 | v45.52,49.58 47.55,49.58 | v45.52,60.15 39.01,66.65 39.01,74.37 41.86,77.22 WD_EN.1 | 47.55,49.58 IC5.11
  Bottom 0.406: v45.52,49.58 v45.52,60.15
N$22
  Top 0.406: IC6.1 39.01,45.92 40.54,45.92 40.54,50.8 41.35,51.61 46.33,51.61 46.74,52.02 47.55,52.02 IC5.9
N$23  (via drill 0.6, 0.61)
  Top 0.254: U$1.1 42.16,49.23 v42.16,50.42
  Top 0.406: 87.78,38.2 91.44,41.86 LED8.A | 87.78,38.2 87.78,34.54 SHIFT_TEST.8 87.38,34.14 84.94,31.7 84.94,30.07 80.87,30.07 IC4.7 | v56.08,52.02 54.05,52.02 IC5.6 | v84.12,41.86 87.78,38.2
  Bottom 0.254: v42.16,50.42 42.16,45.09 46.74,40.51 82.78,40.51 v84.12,41.86
  Bottom 0.406: v56.08,52.02 61.37,46.74 79.25,46.74 v84.12,41.86
N$24
  Top 0.406: IC5.13 47.95,47.14 53.65,47.14 IC5.2
N$25
  Top 0.406: IC8.8 102.82,85.75 102.82,89.81 CH0_V_TP.2 102.82,90.22 102.82,96.32 CH0_VOLTAGES.2
N$26
  Top 0.406: IC8.1 97.94,85.75 99.97,87.78 99.97,89.81 CH0_V_TP.1 100.38,90.22 100.38,96.32 CH0_VOLTAGES.1
N$27
  Top 0.406: IC7.8 86.56,85.75 86.56,89.81 CH1_V_TP.2 86.56,90.22 86.56,96.32 CH1_VOLTAGES.2
N$28
  Top 0.406: IC7.1 81.28,85.75 83.72,88.19 83.72,89.81 CH1_V_TP.1 84.12,90.22 84.12,96.32 CH1_VOLTAGES.1
N$29
  Top 0.406: U$3.6 55.27,82.91 54.86,83.31 54.86,89.81 CH1_REF_TP1.4 54.86,90.22 54.86,96.32 CH1_V_REFS.4
N$30
  Top 0.406: U$3.8 52.43,82.91 47.14,88.19 47.14,89.81 CH1_REF_TP1.1 47.14,90.22 47.14,96.32 CH1_V_REFS.1
N$31
  Top 0.406: U$2.8 66.65,82.91 63.8,85.75 63.8,89.81 CH0_REF_TP1.1 63.8,90.22 63.8,96.32 CH0_V_REFS.1
N$32
  Top 0.406: 71.12,90.22 70.71,89.81 70.71,89.41 69.49,88.19 69.49,82.91 U$2.6 | 71.12,90.22 CH0_V_REFS.4 | 71.12,90.22 CH0_REF_TP1.4
N$33  (via drill 0.61)
  Top 0.406: v44.3,50.39 44.3,50.8 IC5.10 | v44.3,52.83 36.98,60.15 36.98,73.15 33.33,76.81 33.33,77.22 PS_EN.1
  Bottom 0.406: v44.3,50.39 v44.3,52.83
N$34
  Top 0.406: LED1.A 91.44,6.5 87.78,10.16 87.78,16.26 SHIFT_TEST.1 87.38,16.66 83.72,16.66 78.84,21.54 78.84,23.57 74.78,23.57 IC4.15
N$35
  Top 0.406: LED2.A 91.44,11.79 89.81,13.41 89.81,16.66 87.78,18.69 SHIFT_TEST.2 87.38,18.69 84.12,18.69 80.87,21.95 IC4.1
N$36
  Top 0.406: LED3.A 91.44,16.66 89.81,18.29 89.81,19.51 87.78,21.54 SHIFT_TEST.3 87.38,21.95 85.75,23.57 80.87,23.57 IC4.2
N$37
  Top 0.406: LED4.A 91.44,21.95 89.81,21.95 SHIFT_TEST.4 87.38,24.38 87.38,24.79 80.87,24.79 IC4.3
N$38
  Top 0.406: LED5.A 91.44,26.82 87.78,26.82 SHIFT_TEST.5 87.38,26.42 87.38,26.01 80.87,26.01 IC4.4
N$39
  Top 0.406: LED7.A 91.44,36.58 89.81,34.95 89.81,34.14 87.78,32.11 SHIFT_TEST.7 87.38,31.7 85.75,30.07 85.75,28.85 80.87,28.85 IC4.6
N$40
  Top 0.406: LED1.C 93.88,6.5 97.94,6.5 R3.2
N$41
  Top 0.406: LED2.C 93.88,11.38 97.94,11.38 R7.2
N$42
  Top 0.406: LED3.C 93.88,16.66 97.94,16.66 R8.2
N$43
  Top 0.406: LED4.C 93.88,21.54 97.94,21.54 R9.2
N$44
  Top 0.406: LED5.C 93.88,26.82 97.94,26.82 R10.2
N$45
  Top 0.406: LED6.C 93.88,31.7 97.94,31.7 R11.2
N$46
  Top 0.406: LED7.C 93.88,36.98 97.94,36.98 R12.2
N$47
  Top 0.406: LED8.C 93.88,41.86 97.94,41.86 R13.2
N$48  (via drill 0.61)
  Top 0.406: 8.53,22.76 10.16,22.76 R1.2 | 8.53,22.76 5.28,22.76 R2.2 | 8.53,22.76 v8.53,19.51
  Bottom 0.406: v8.53,19.51 12.6,15.44 CONTRAST_EN.2
N$49
  Top 0.406: IC1.12 23.16,69.9 23.98,70.71 23.98,84.53 28.85,89.41 28.85,89.81 I2C_TP.2 29.26,90.22 29.26,96.32 I2C_TEMPS.2
N$50
  Top 0.406: IC1.11 25.6,69.9 26.42,70.71 26.42,84.53 31.7,89.81 I2C_TP.3 31.7,90.22 31.7,96.32 I2C_TEMPS.3
N$51  (via drill 0.6)
  other vias: 42.16,50.42
N$57
  Bottom 0.406: CHMBR_TMP.3 5.28,68.68 12.6,68.68 CHMBR_TMP_TP.3 13.01,68.28 20.73,68.28 21.54,67.46 28.45,67.46 30.48,69.49 IC1.9
N$58
  Bottom 0.406: CH1_TMP.3 5.28,52.02 12.6,52.02 CH1_TMP_TP.3 13.01,52.43 32.92,52.43 32.92,69.49 IC1.8
N$59
  Bottom 0.406: CH0_TMP_TP.3 12.6,35.76 5.28,35.76 CH0_TMP.3 4.88,35.76 2.85,35.76 2.85,71.53 4.06,72.75 35.36,72.75 35.36,69.9 IC1.7
NC  (via drill 0.61)
  Top 0.406: v81.69,77.22 81.69,81.28 81.28,81.69 IC7.4 | v96.32,77.62 97.54,78.84 97.54,81.69 IC8.4
  Bottom 0.406: v81.69,77.22 82.09,77.62 v96.32,77.62
PB_DN
  Top 0.406: S3_DN.2B 110.13,13.01 110.13,18.69 S3_DN.2A
  Bottom 0.406: IC1.17 33.33,21.54 33.33,19.51 41.45,19.51 43.08,21.13 43.08,23.98 55.68,23.98 56.9,25.2 84.12,25.2 86.56,22.76 106.48,22.76 110.13,19.1 S3_DN.2A
PB_SEL
  Top 0.406: S2_SEL.2B 110.13,26.82 110.13,32.92 S2_SEL.2A
  Bottom 0.406: IC1.16 30.48,24.79 22.35,24.79 21.54,25.6 21.54,34.14 77.62,34.14 80.06,36.58 106.88,36.58 110.13,33.33 S2_SEL.2A
PB_UP
  Top 0.406: S1_UP.2B 110.13,40.64 110.13,46.74 S1_UP.2A
  Bottom 0.406: IC1.15 27.64,21.95 25.6,23.98 21.95,23.98 17.48,28.45 17.48,39.83 78.03,39.83 79.25,38.61 108.1,38.61 110.13,40.64 S1_UP.2B
SCK  (via drill 0.61)
  Top 0.406: v55.68,75.18 55.68,76.81 55.27,77.22 U$3.3 | U$2.3 69.09,77.22 69.09,76 v68.28,75.18 61.77,68.68 61.77,50.8 69.09,43.48 | v76.4,28.45 74.78,28.45 IC4.11 | IC1.26 57.71,21.95 v64.21,28.45 64.21,38.61 69.09,43.48 | 69.09,43.48 71.53,45.92 IC2.1
  Bottom 0.406: v68.28,75.18 v55.68,75.18 | v64.21,28.45 v76.4,28.45 | SPI_HEADER.3 50.8,15.44 54.86,19.51 55.68,19.51 57.71,21.54 IC1.26

## Text on the board
tPlace: 01/12/2011 | Battery Cycler logic board R1